# Altium PCB SDVX_Mini.PcbDoc
Units mm, origin at the board's own origin, x right, y up, seen from the top; angles counter-clockwise.
Board outline 150.1 x 96.75 mm, 2 copper layers (Top Layer, Bottom Layer); 18 components, 23 nets, 134 pads, 11 vias.
Unrouted connection lines stored in the file: 28.
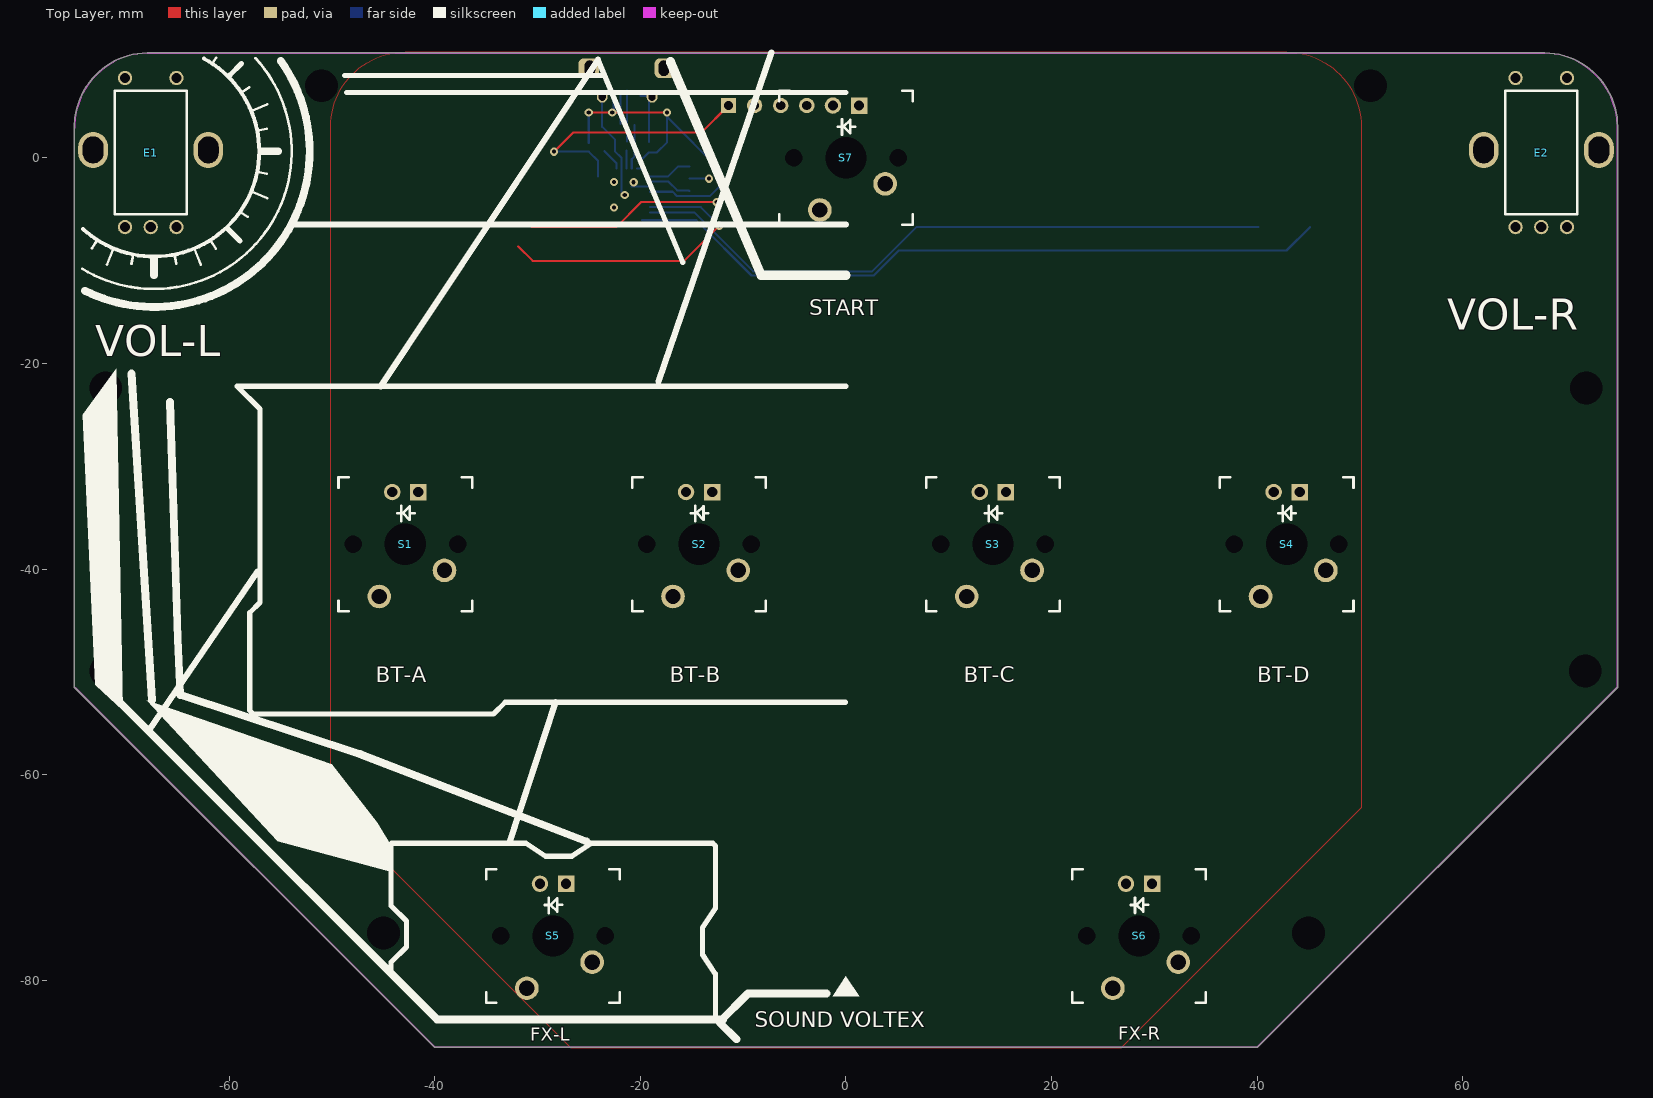
[diagram p0: Top Layer view]
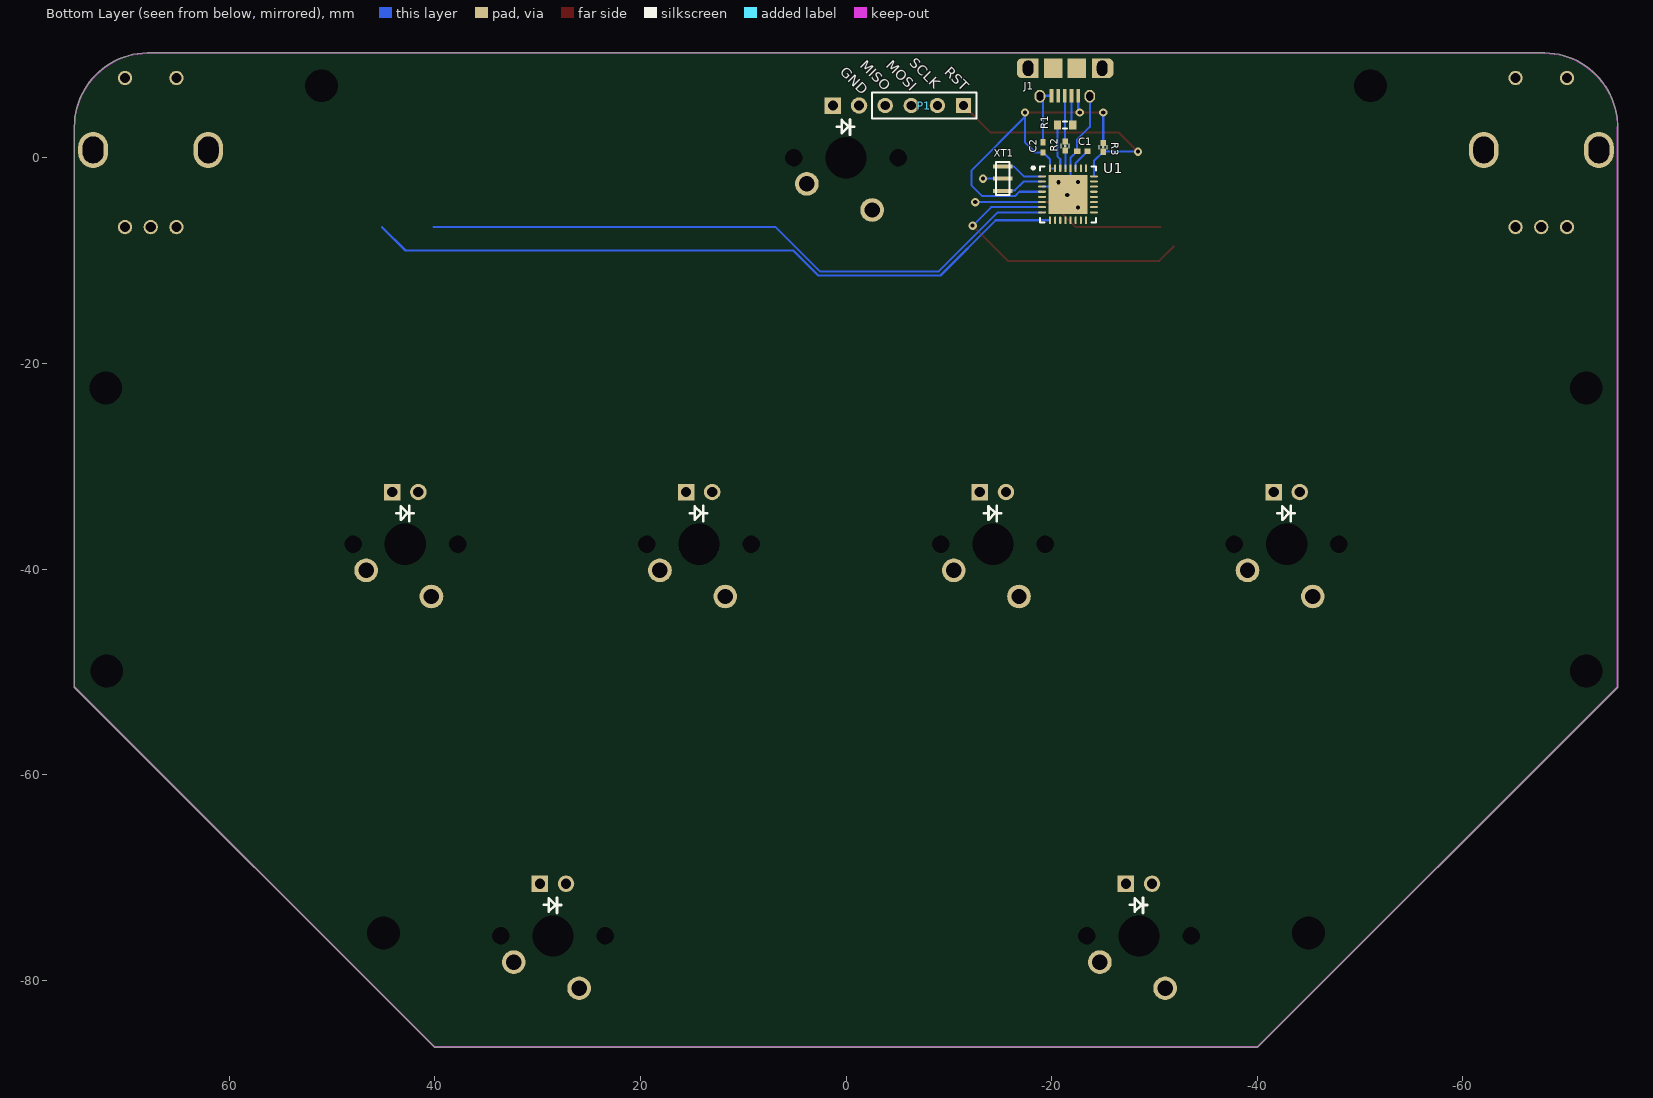
[diagram p1: Bottom Layer view, seen from below]

## Layer stack, top to bottom
Top Solder: solder mask 0.0102, Solder Resist, Dk 3.5
Top Layer: signal copper 0.0356
Dielectric 1: dielectric 0.32, FR-4, Dk 4.8
Bottom Layer: signal copper 0.0356
Bottom Solder: solder mask 0.0102, Solder Resist, Dk 3.5

## Board outline
-75.009,-51.55 cw(c-75,-51.5) -75.05,-51.5 -75.05,2.955 cw(c-67.839,3) -67.976,10.21 cw(c-67.975,10.16) -67.975,10.21 67.975,10.21 cw(c67.975,10.16) 67.976,10.21 cw(c67.839,3) 75.051,3 cw(c67.839,3) 75.05,2.955 75.05,-51.5 cw(c75,-51.5) 75.009,-51.55 40.036,-86.523 40.036,-86.522 cw(c40,-86.487) 40,-86.537 -40,-86.537 cw(c-40,-86.487) -40.036,-86.522 -40.036,-86.523

## Design rules (kind name [scope] priority, off if disabled: settings)
Clearance [All] p1: gap=0.203
DiffPairsRouting [All] p1: maxlimit=0.254 minlimit=0.254 mostfreqgap=0.254 toplayer_minwidth=0.2 toplayer_maxwidth=0.381 toplayer_prefwidth=0.381 bottomlayer_minwidth=0.2 bottomlayer_maxwidth=0.381 bottomlayer_prefwidth=0.381 maxuncoupledlength=12.7
HoleSize [All] p1: absolutevalues=TRUE maxlimit=8 minlimit=0.025 maxpercent=80.000 minpercent=20.000
MinimumSolderMaskSliver [All] p1: minsoldermaskwidth=0.04
PolygonConnect [All] p1: connectstyle=Relief reliefconductorwidth=0.254 reliefentries=4 polygonreliefangle="90 Angle" airgapwidth=0.254
RoutingVias [All] p1: holewidth=0.4 width=0.5 viastyle="Through Hole" minholewidth=0.3 minwidth=0.4 maxholewidth=6.35 maxwidth=6.4
SolderMaskExpansion [All] p1: expansion=0.102
Width [All] p1: maxlimit=0.635 minlimit=0.178 preferedwidth=0.254 bottomlayer_minwidth=0.178 minimp=50.000000 maximp=50.000000 favimp=50.000000
26 further rules are at their usual default settings.

## Classes and differential pairs
differential pair D: +D_P -D_N
differential pair D2: +D2_P -D2_N

## Components (designator, comment, footprint, x,y, rotation, side; value= is the part's Value field where it differs from the comment)
C1 "Cap Semi" 0402 -22.987,0.635 r0 bottom
C2 "Filter" 0402 -19.177,1.016 r90 bottom
E1 "ENCODER_SWITCH" ENCODER_BOURNS -67.625,0.508 r0 top
E2 "ENCODER_SWITCH" ENCODER_BOURNS 67.625,0.508 r0 top
J1 "USB Connector" MICRO-USB-SEEED -21.311,10.16 r180 bottom
P1 "Header 4" HDR1X4 -11.43,5.08 r0 bottom
R1 "" J1-0603 -21.312,3.175 r0 bottom
R2 "Res3" 0402-RES -21.312,1.143 r270 bottom
R3 "" 0402-RES -25.019,1.016 r90 bottom
S1 "Cherry MX" CHERRYMX -42.862,-37.592 r0 top
S2 "Cherry MX" CHERRYMX -14.287,-37.592 r0 top
S3 "Cherry MX" CHERRYMX 14.287,-37.592 r0 top
S4 "Cherry MX" CHERRYMX 42.862,-37.592 r0 top
S5 "Cherry MX" CHERRYMX -28.5,-75.692 r0 top
S6 "Cherry MX" CHERRYMX 28.5,-75.692 r0 top
S7 "Cherry MX" CHERRYMX 0,0 r0 top
U1 "ATmega16U2-MU" ATMEGA16U2-NOTHERMAL -21.59,-3.556 r180 bottom
XT1 "Resonator" RESONATOR -15.24,-2.032 r270 bottom

## Footprints (in the part's own frame and the unit in brackets; to place one, negate y for a bottom-side part, rotate by r counter-clockwise, add the part's x,y. Pads: shape width x height; smd on the part's side, far side on the other; paste and mask are expansions set on the pad)
0402 [mm] "Chip Capacitor, Body 1.0x0.5mm, IPC High Density"
  rect 0.6x0.5 smd: 1(-0.5,0) 2(0.5,0)
  body extent -0.55,-0.3 0.55,0.3, height 1.3
0402-RES [mm]
  rect 0.6x0.55 smd: 1(-0.425,0) 2(0.425,0)
  silkscreen extent -0.2,-0.4 0.2,0.4, body extent -0.5,-0.25 0.5,0.25, height 0.4
ATMEGA16U2-NOTHERMAL [mm]
  oval 0.75x0.2 smd: 1(-2.525,1.75) 2(-2.525,1.25) 3(-2.525,0.75) 4(-2.525,0.25) 5(-2.525,-0.25) 6(-2.525,-0.75) 7(-2.525,-1.25) 8(-2.525,-1.75) 17(2.525,-1.75) 18(2.525,-1.25) 19(2.525,-0.75) 20(2.525,-0.25) 21(2.525,0.25) 22(2.525,0.75) 23(2.525,1.25) 24(2.525,1.75)
  oval 0.2x0.75 smd: 9(-1.75,-2.525) 10(-1.25,-2.525) 11(-0.75,-2.525) 12(-0.25,-2.525) 13(0.25,-2.525) 14(0.75,-2.525) 15(1.25,-2.525) 16(1.75,-2.525) 25(1.75,2.525) 26(1.25,2.525) 27(0.75,2.525) 28(0.25,2.525) 29(-0.25,2.525) 30(-0.75,2.525) 31(-1.25,2.525) 32(-1.75,2.525)
  rect 3.8x3.8 smd: 33(0.003,0)
  silkscreen extent -3.5,-2.72 2.73,2.72, body extent -2.58,-2.58 2.57,2.57, height 1
CHERRYMX [mm]
  round 2.3 hole 1.5: 1(-2.54,-5.08) 2(3.81,-2.54)
  rect 1.6x1.6 hole 1: 3(1.27,5.08)
  round 1.6 hole 1: 4(-1.27,5.08)
  round 0 hole 1.7 unplated: ""(-5.08,0) ""(5.08,0)
  round 0 hole 4 unplated: ""(0,0)
  silkscreen extent -6.5,-6.5 6.5,6.5, body extent -7.8,-7.95 7.8,7.96, height 15.07
ENCODER_BOURNS [mm] "PEC12R-4xxxF-Sxxxx (Horizontal Mount - Axial PC Pin/No Bushing, Push Momentary Switch)"
  round 1.4 hole 1: 1(-2.5,7.25) 2(2.5,7.25) A(-2.5,-7.25) B(2.5,-7.25) C(0,-7.25)
  oval 2.9x3.5 hole 2 slot 2.6 at 90 deg: ""(-5.6,0.25) ""(5.6,0.25)
  silkscreen extent -3.5,-6 3.5,6, body extent -7,-7.25 7,7.5, height 17.5
HDR1X4 [mm] "Connector; Header; 4 Position"
  rect 1.5x1.5 hole 0.9: 1(0,0)
  round 1.5 hole 0.9: 2(2.54,0) 3(5.08,0) 4(7.62,0)
  silkscreen extent -1.27,-1.27 8.89,1.27
J1-0603 [mm] "Chip Resistor, Body 1.6x0.8mm, IPC High Density"
  rect 0.7x0.9 smd: 1(-0.75,0) 2(0.75,0)
  silkscreen extent -0.2,-0.35 0.2,0.35, body extent -0.85,-0.48 0.85,0.48, height 0.9
MICRO-USB-SEEED [mm] "ZX62D-B-5P8"
  rect 0.35x1.35 smd: 1(1.275,-4.125) 2(0.625,-4.125) 3(-0.025,-4.125) 5(-1.325,-4.125) ""(-0.675,-4.125)
  rrect50% 2x1.9 hole 1 slot 1.5 at 90 deg copper offset -0.1,0: 5(-3.6,-1.45)
  rect 1x1.9 smd: 5(-3.1,-1.45) 5(3.1,-1.45)
  oval 1.05x1.25 hole 0.65 slot 0.85 at 90 deg: 5(-2.45,-4.18) 5(2.4,-4.18)
  rrect50% 2x1.9 hole 1 slot 1.5 at 90 deg copper offset 0.1,0: 5(3.6,-1.45)
  rect 1.8x1.9 smd: ""(-1.175,-1.45) ""(1.125,-1.45)
  Keep-Out Layer lines w0: 3.55,0 -3.6,0
RESONATOR [mm]
  rect 0.4x1.9 smd: 1(1.2,0) 2(0,0) 3(-1.2,0)
  silkscreen extent -1.6,-0.65 1.6,0.65

## Part data
C1: "Capacitor (Semiconductor SIM Model)"
C2: library part "Cap Semi", "Capacitor (Semiconductor SIM Model)"
P1: "Header, 4-Pin"
R1 R3: library part Res3, "Resistor"
R2: "Resistor"
U1: "8-bit AVR Microcontroller, 2.7-5.5V, 16KB Flash, 512 Bytes EEPROM, 512 Bytes SRAM, 32-pin VQFN, Industrial Grade (-40°C to 85°C)"

## Free pads (board coordinates)
  round 0 hole 3.2 unplated: ""(-72,-49.9) ""(-72,-22.4) ""(-51,7) ""(-45,-75.387) ""(45,-75.387) ""(51,7) ""(71.9,-49.9) ""(72,-22.4)

## Via types
v1: diameter 0.8, hole 0.4, Top Layer to Bottom Layer, tented both sides, 11 vias

## Nets (pads, with @x,y where several pads share a name; then routed paths per layer and width w, separated by ;. In a path a pad name is that pad's centre, name@x,y a point inside that pad or via, vN(x,y) a via of type N, cw(c..) or ccw(c..) an arc to the next point about the centre after c; other vN are vias at no path point)
D2_N: J1.2 R1.1 | length 2.7
  Bottom Layer w0.2: R1.1@-21.937,3.3 J1.2@-21.937,6.045
D2_P: J1.3 R2.1 | length 5
  Bottom Layer w0.2: R2.1@-21.291,1.59 -21.287,1.593 J1.3@-21.287,6.543
D_N: R1.2 U1.30 | length 4.3
  Bottom Layer w0.2: U1.30 -20.84,-0.139 -20.562,0.139 R1.2
D_P: R2.2 U1.29 | length 1.7
  Bottom Layer w0.2: U1.29 R2.2@-21.34,0.69
ENC1A: E1.A U1.7 | length 29
  Top Layer w0.203: -31.877,-8.636 -30.48,-10.033 -15.748,-10.033 v1(-12.319,-6.604)
  Bottom Layer w0.2: -14.117,-4.806 v1(-12.319,-6.604)
  Bottom Layer w0.203: U1.7 -14.117,-4.806
ENC1B: E1.B U1.6 | length 25.5
  Top Layer w0.2: -30.596,-6.742 -22.363,-6.742 -19.939,-4.318 v1(-12.573,-4.318)
  Bottom Layer w0.203: U1.6 v1@-12.585,-4.306
ENC2A: E2.A U1.8 | length 63.4
  Bottom Layer w0.203: U1.8 -14.76,-5.306 -9.017,-11.049 2.54,-11.049 6.847,-6.742 40.125,-6.742
ENC2B: E2.B U1.9 | length 69.1
  Bottom Layer w0.203: U1.9 -14.56,-6.081 -9.185,-11.455 2.708,-11.455 5.147,-9.017 42.85,-9.017 45.125,-6.742
GND: C1.2 C2.2 E1.C E2.C J1.5 S1.1 S2.1 S3.1 S4.1 S5.1 S6.1 S7.1 S7.4 U1.3 U1.28 U1.33 XT1.2 | length 19.4
  Bottom Layer w0.203: J1.5@-23.713,5.98 -23.713,3.012 -22.487,1.786 C1.2 -21.84,-0.012 U1.28 U1.33@-21.84,-3.309 ; U1.33@-20.843,-2.806 U1.3 ; J1.5@-19.986,6.035 J1.5@-18.916,6.035 ; C2.2 -19.177,5.664 J1.5@-18.861,5.98 ; XT1.2 v1(-13.335,-2.032)
  other v1: -22.555,-4.826 -21.514,-3.632 -20.65,-2.388 -22.555,-2.362
MISO: P1.4 U1.17
MOSI: P1.3 S3.2 U1.16
NetC1_1: C1.1 U1.27 | length 2.1
  Bottom Layer w0.203: C1.1 -22.34,-0.512 U1.27
NetU1_1: U1.1 XT1.3 | length 4.2
  Bottom Layer w0.203: U1.1 -17.3,-1.806 -16.326,-0.832 XT1.3
NetU1_2: U1.2 XT1.1 | length 4.2
  Bottom Layer w0.203: U1.2 -17.292,-2.306 -16.423,-3.175 -15.297,-3.175 XT1.1
RESET: P1.1 R3.1 U1.24 | length 25
  Top Layer w0.2: v1(-28.404,0.591) -26.557,2.438 -14.072,2.438 P1.1
  Bottom Layer w0.2: v1(-28.404,0.591) R3.1 -24.115,-0.313 U1.24
SCLK: P1.2 U1.15
SW_A: S1.2 U1.22
SW_B: S2.2 U1.18
SW_D: S4.2 U1.12
SW_FXL: S5.2 U1.20
SW_FXR: S6.2 U1.14
SW_START: S7.2 U1.11
VCC: C2.1 J1.1 R3.2 U1.4 U1.31 U1.32 | length 36.4
  Top Layer w0.2: v1(-25.019,4.394) v1(-22.733,4.394) v1(-17.399,4.394)
  Bottom Layer w0.2: R3.2 v1(-25.019,4.394) ; v1(-22.733,4.394) -22.587,4.54 J1.1@-22.587,6.543 ; U1.31 U1.32 -19.84,-0.147 C2.1 -18.407,0.516 -17.399,1.524 -17.399,3.962 ; U1.4 -16.864,-3.306 -16.435,-3.735 -13.235,-3.735 -12.217,-2.718 -12.217,-1.219 -17.399,3.962 ; v1(-17.399,4.394) -17.399,3.962
pads on no net: E1. E1.1 E1.2 E2. E2.1 E2.2 J1. S1. S1.3 S1.4 S2. S2.3 S2.4 S3. S3.3 S3.4 S4. S4.3 S4.4 S5. S5.3 S5.4 S6. S6.3 S6.4 S7. S7.3 U1.5 U1.10 U1.13 U1.19 U1.21 U1.23 U1.25 U1.26

## Polygon pours and split planes (outlines as drawn)
GND on Top Layer "Top Overlay-Gnd" (solid, shelved, pour order 3): -50.09,-63.248 cw(c-50,-63.157) -50.127,-63.157 -50.127,2.998 cw(c-42.838,2.998) -42.977,10.286 cw(c-42.975,10.159) -42.908,10.267 cw(c-42.838,10.16) -42.838,10.287 42.838,10.287 cw(c42.838,10.16) 42.908,10.267 cw(c42.975,10.159) 42.977,10.286 cw(c42.838,2.998) 50.127,2.998 50.127,-63.157 cw(c50,-63.157) 50.09,-63.248 50.09,-63.247 26.76,-86.577 26.761,-86.577 cw(c26.67,-86.487) 26.67,-86.614 -26.67,-86.614 cw(c-26.67,-86.487) -26.761,-86.577 -26.76,-86.577

## Keep-outs
Keep-Out Layer:
  lines w0.1: -75,-51.5 -75,2.998 ; -74.999,2.863 cw(c-67.839,3) -67.975,10.16 0,10.16 67.975,10.16 cw(c67.839,3) 74.999,2.863 ; -74.987,-51.5 -40,-86.487 0,-86.487 40,-86.487 74.987,-51.5 ; 75,-51.5 75,2.998

## Silkscreen, mask and mechanical layers (free items; w line width, h text height)
Top Overlay:
  region: -1.27,-81.534 1.27,-81.534 0,-79.629
  region: -68,-52.75 -50,-59 -45.6,-64.7 -44.2,-67 -44.1,-69.5 -55.25,-66.5
  region: -72.25,-52 -73,-51.25 -74.25,-25 -71,-20.5 -71,-20.75 -70.341,-53.75
  lines w0.254: -74.295,-10.795 ccw(c-67.31,0.635) -57.44,9.691 ; -73.337,-8.786 -72.814,-8.002 ; -71.876,-10.377 -71.254,-8.875 ; -69.491,-10.306 -69.308,-9.382 ; -65.312,-9.382 -65.129,-10.306 ; -63.366,-8.875 -62.744,-10.377 ; -61.806,-8.053 -61.283,-8.837 ; -61.636,9.159 -61.267,9.712 ; -58.982,-5.228 -58.198,-5.752 ; -58.811,6.334 -58.027,6.858 ; -57.774,-3.309 -56.272,-3.931 ; -57.774,4.579 -56.272,5.201 ; -57.268,-1.363 -56.343,-1.546 ; -57.268,2.633 -56.343,2.816
  lines w0.381: -74.226,-6.915 ccw(c-67.31,0.635) -62.428,9.635
  lines w0.508: -60.113,-6.921 -58.946,-8.089 ; -59.943,8.028 -58.793,9.177 ; -48.75,8 -23.5,8 ; -48.59,6.35 0,6.35 ; -44.25,-79.159 -44.25,-78.25 -42.75,-76.75 -42.75,-74.25 -44.25,-72.75 -44.25,-66.75 -44.175,-66.675 -42.175,-66.675 -38.1,-66.675 -31.115,-66.675 -29.21,-67.945 -26.67,-67.945 -24.765,-66.675 -17.145,-66.675 -12.954,-66.675 -12.7,-66.929 -12.7,-73.025 -13.97,-74.93 -13.97,-77.47 -12.7,-79.375 -12.7,-83.82 ; -24.13,9.525 -15.875,-10.16 ; -0.041,-52.959 -33.147,-52.959 -34.29,-54.102 -57.648,-54.102 -58,-53.75 -58,-44.25 -57,-43.25 -57,-24.45 -59.225,-22.225 -54.975,-22.225 -40.894,-22.225 0,-22.225
  lines w0.6: -67.841,-55.75 -57.25,-40.25 ; -53.75,-6.5 0,-6.5 ; -45.25,-22.225 -24.13,9.525 ; -32.724,-66.601 -28.25,-52.959 ; -18.25,-21.755 -7.25,10.25
  lines w0.762: -74.043,-12.933 ccw(c-67.31,0.635) -54.971,9.42 ; -71.75,-51.841 -65.77,-57.82 -39.771,-83.82 -11.938,-83.82 ; -67.31,-11.43 -67.31,-9.779 ; -65.75,-23.75 -65,-46.75 -64.75,-52.25 -47.25,-58 -25.25,-66.5 ; -56.871,0.635 -55.245,0.635 ; -10.655,-85.738 -12.319,-84.074 -9.525,-81.28 -1.905,-81.28
  lines w0.8: -69.5,-21 -67.5,-52.75
  lines w0.889: -17.075,9.359 -8.255,-11.43 0,-11.43
  text "START" at -3.581,-15.316 h1.52
  text "VOL-R" at 58.5,-16.75 h3
  text "VOL-L" at -73.025,-19.304 h3
  text "BT-A" at -45.72,-51 h1.52
  text "BT-B" at -17.145,-51 h1.52
  text "BT-C" at 11.43,-51 h1.52
  text "BT-D" at 40.005,-51 h1.52
  text "SOUND VOLTEX" at -8.89,-84.582 h1.52
  text "FX-R" at 26.5,-85.8 h1.27
  text "FX-L" at -30.7,-85.9 h1.27
Bottom Overlay:
  text "SCLK" at -6.096,9.144 h1 r45
  text "MOSI" at -3.81,8.89 h1 r45
  text "MISO" at -1.27,8.89 h1 r45
  text "RST" at -9.525,8.255 h1 r45
  text "GND" at 0.635,8.255 h1 r45